# Altium PCB ServoShield.PcbDoc
Units mm, origin at the board's own origin, x right, y up, seen from the top; angles counter-clockwise.
Board outline 82.5 x 82.5 mm, 2 copper layers (Top Layer, Bottom Layer); 45 components, 113 nets, 285 pads, 182 vias.
Unrouted connection lines stored in the file: 1.
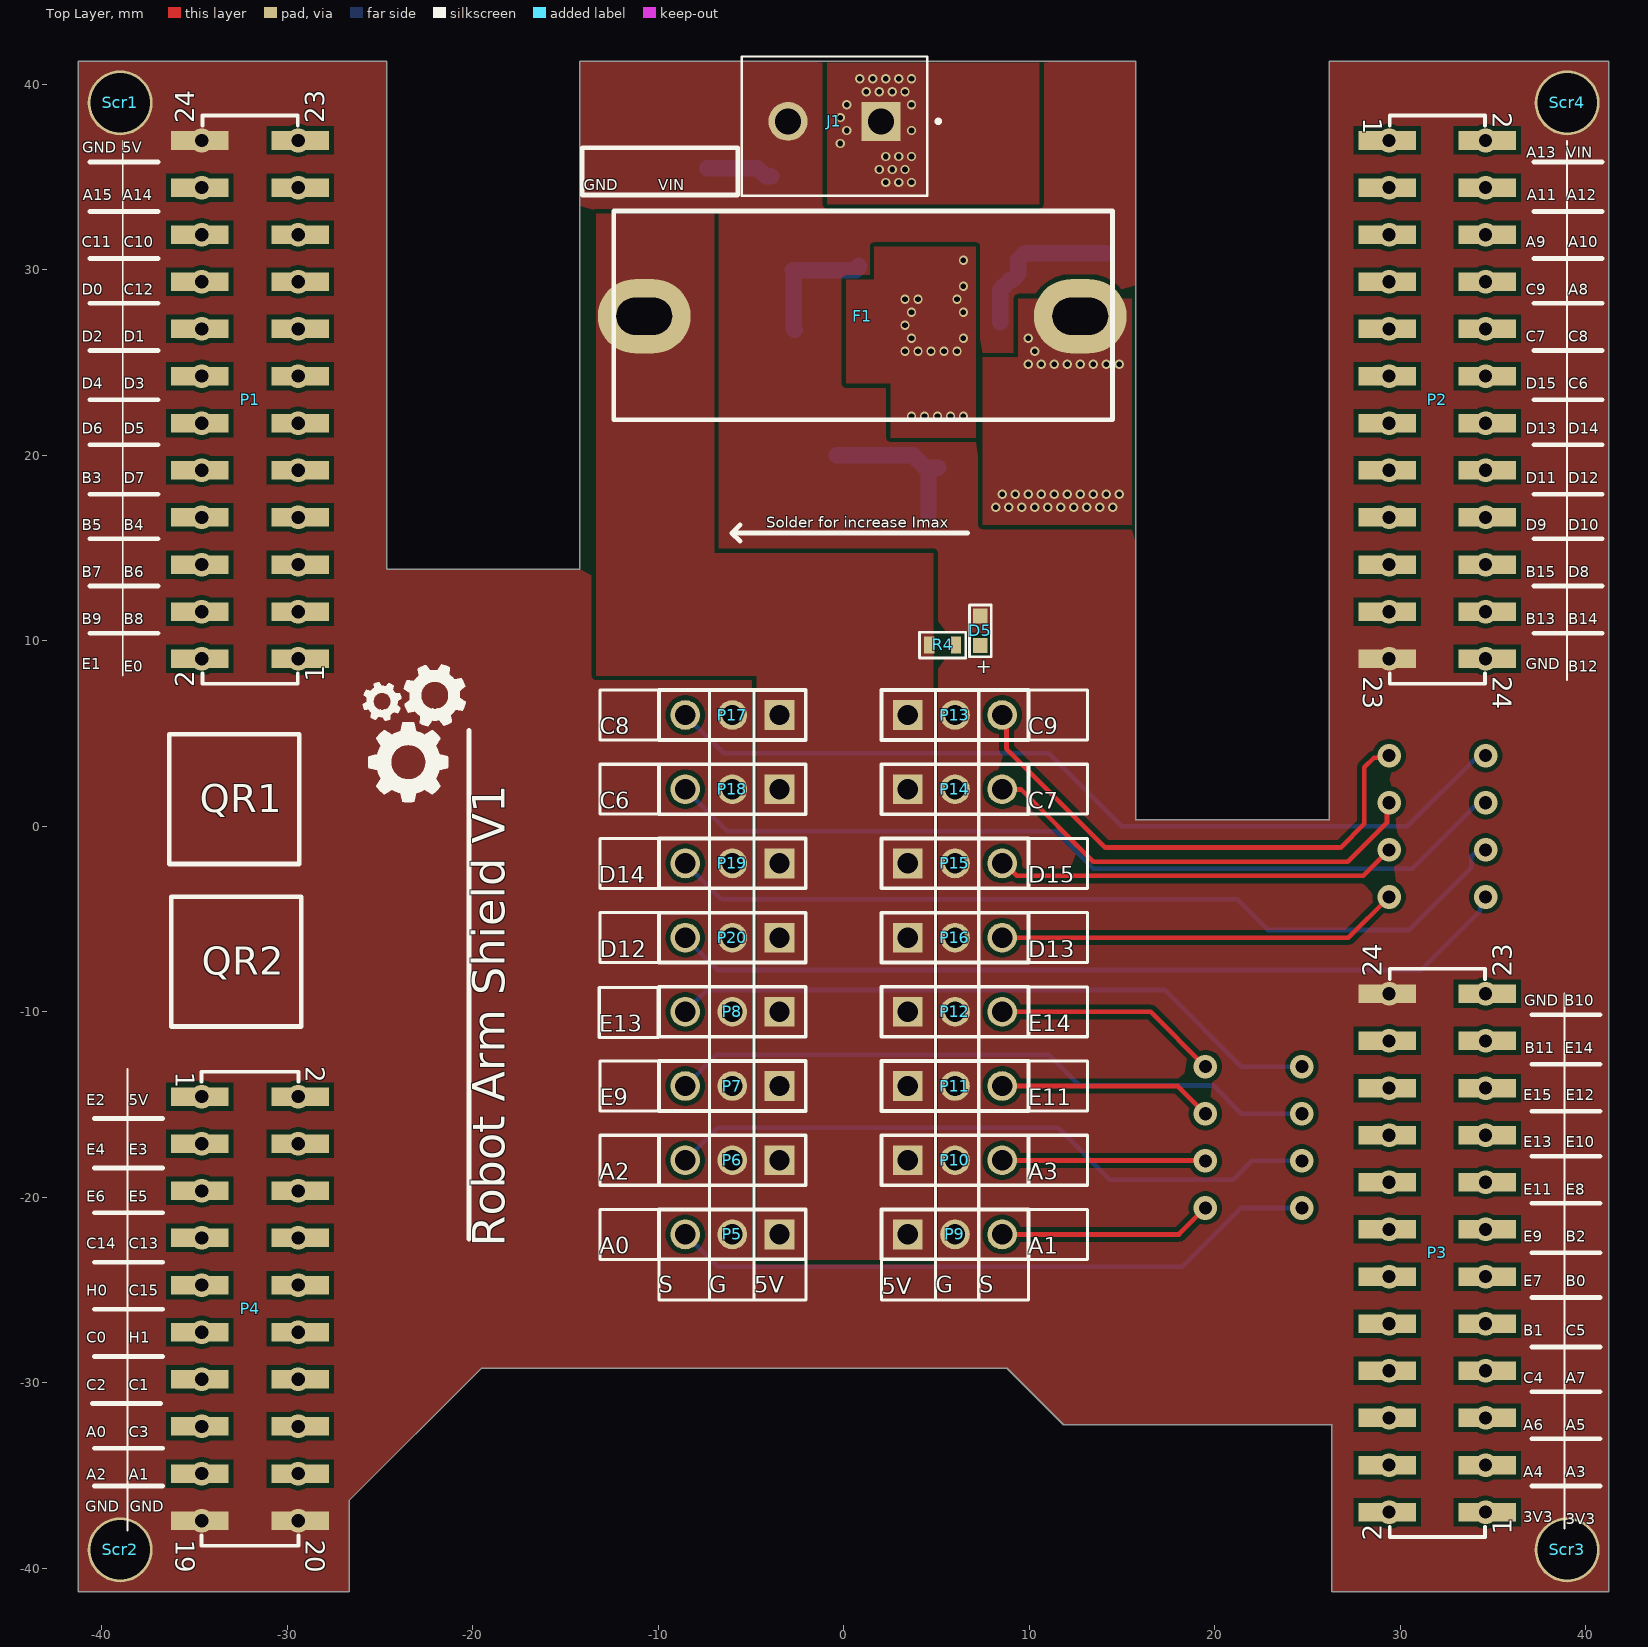
[diagram p0: Top Layer view]
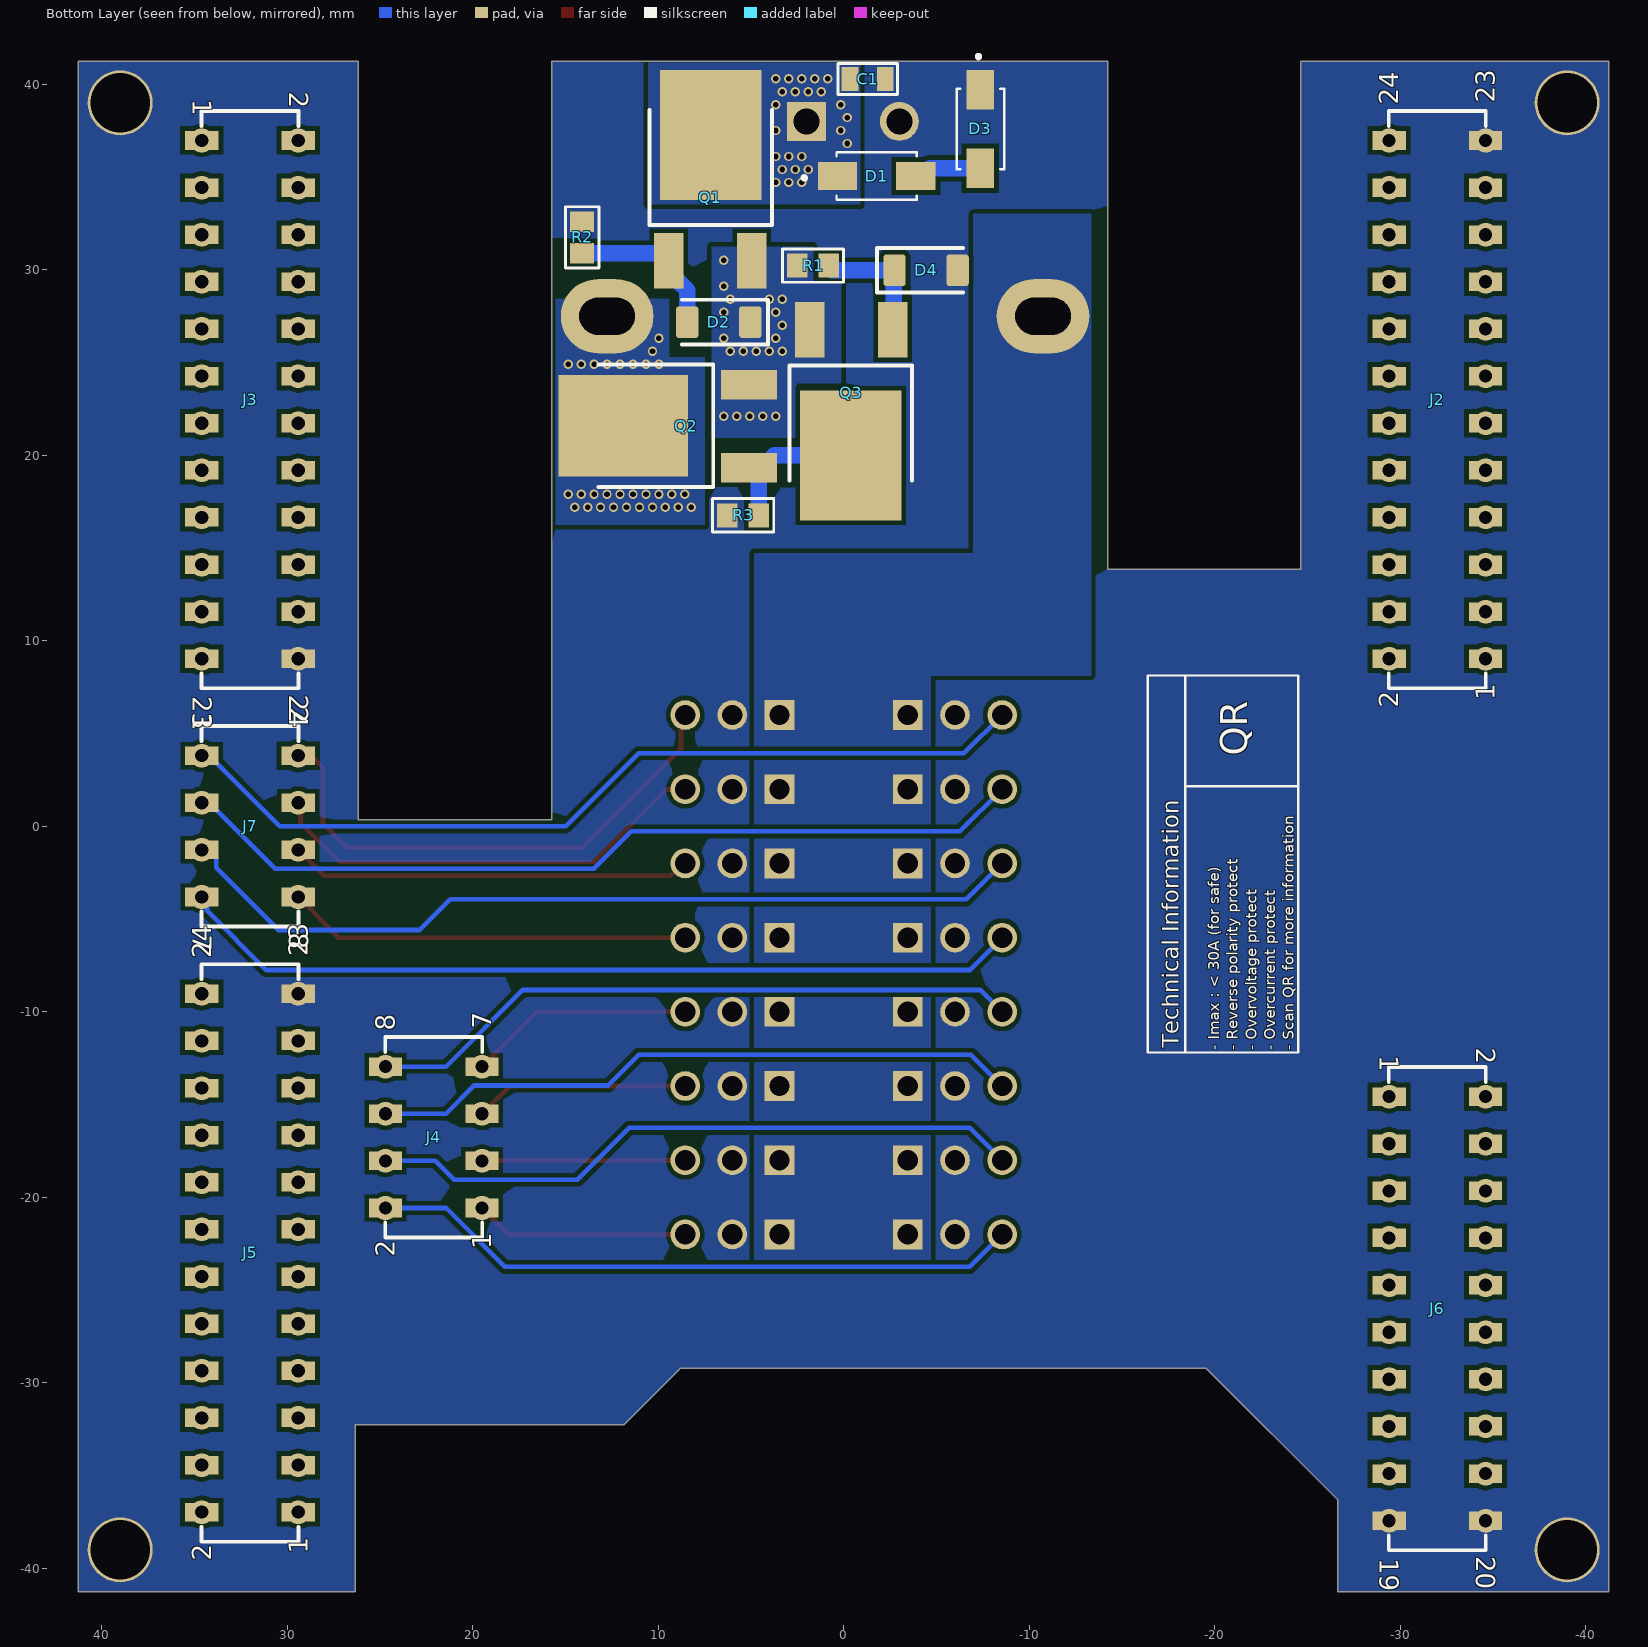
[diagram p1: Bottom Layer view, seen from below]
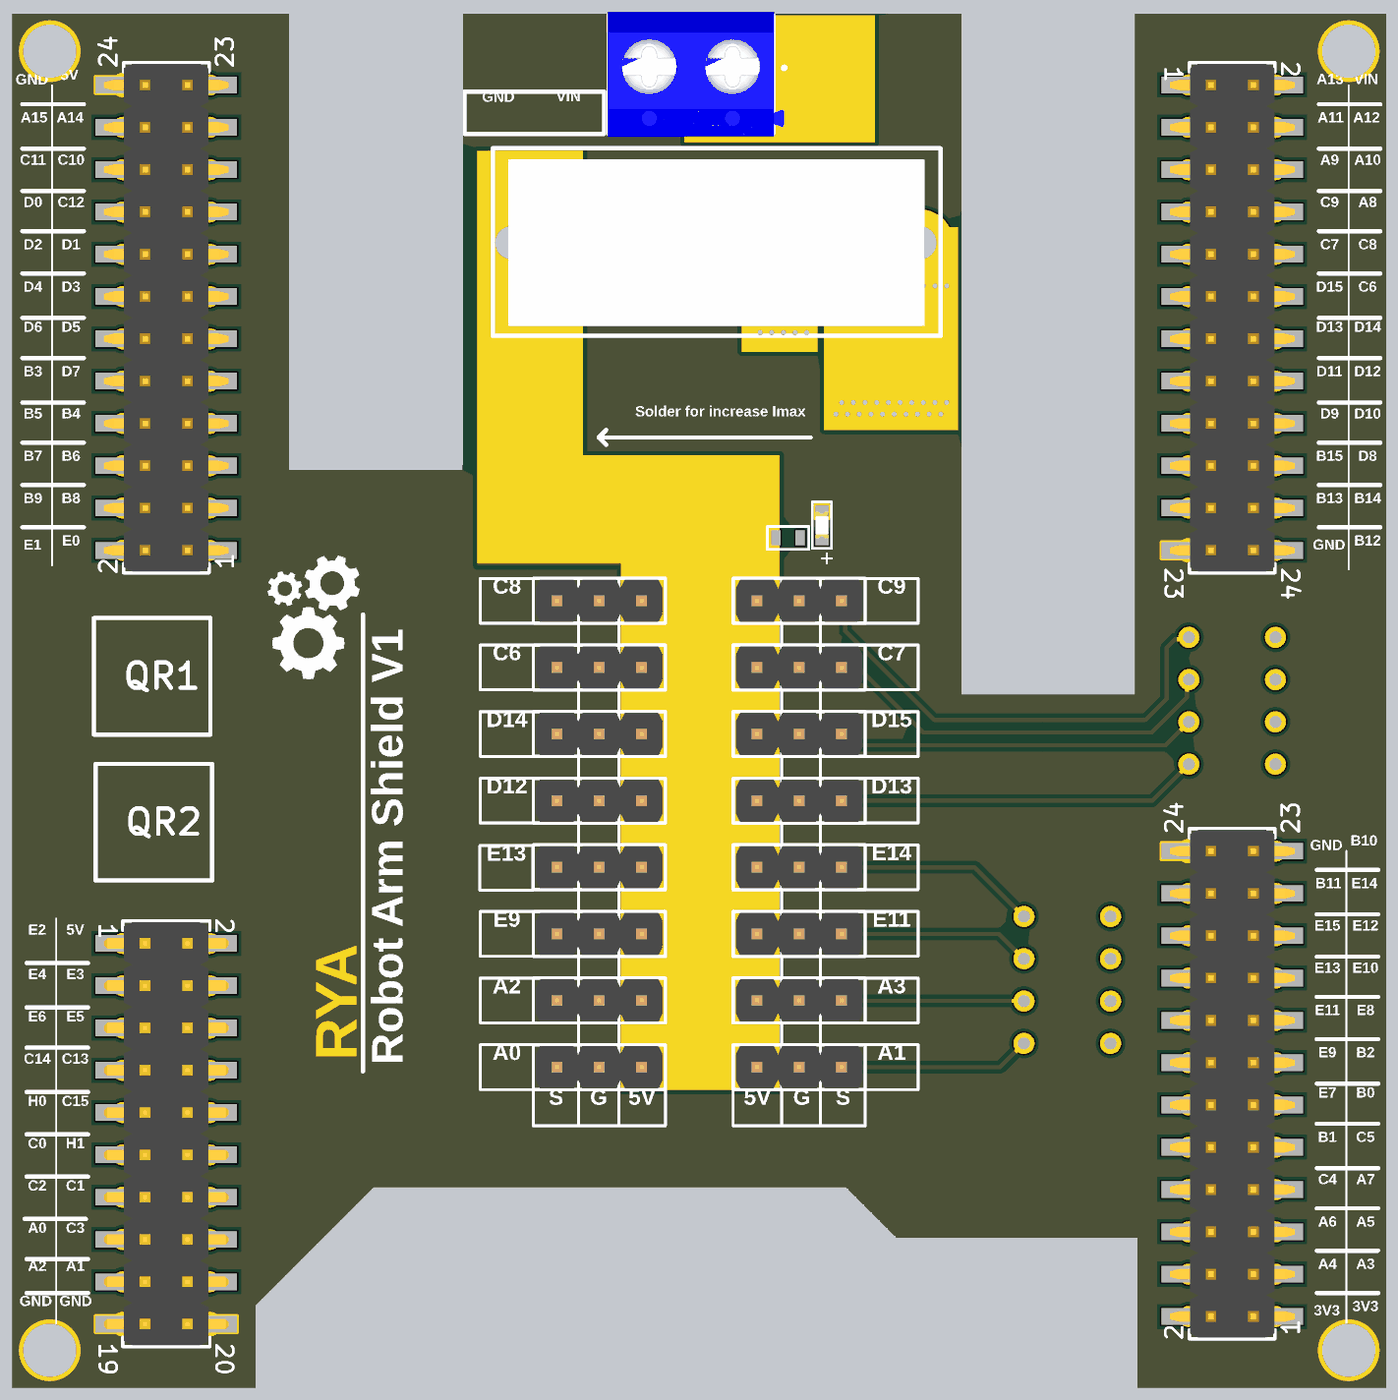
[diagram p2: 3D render of the assembled board from above, using the file's embedded part models]
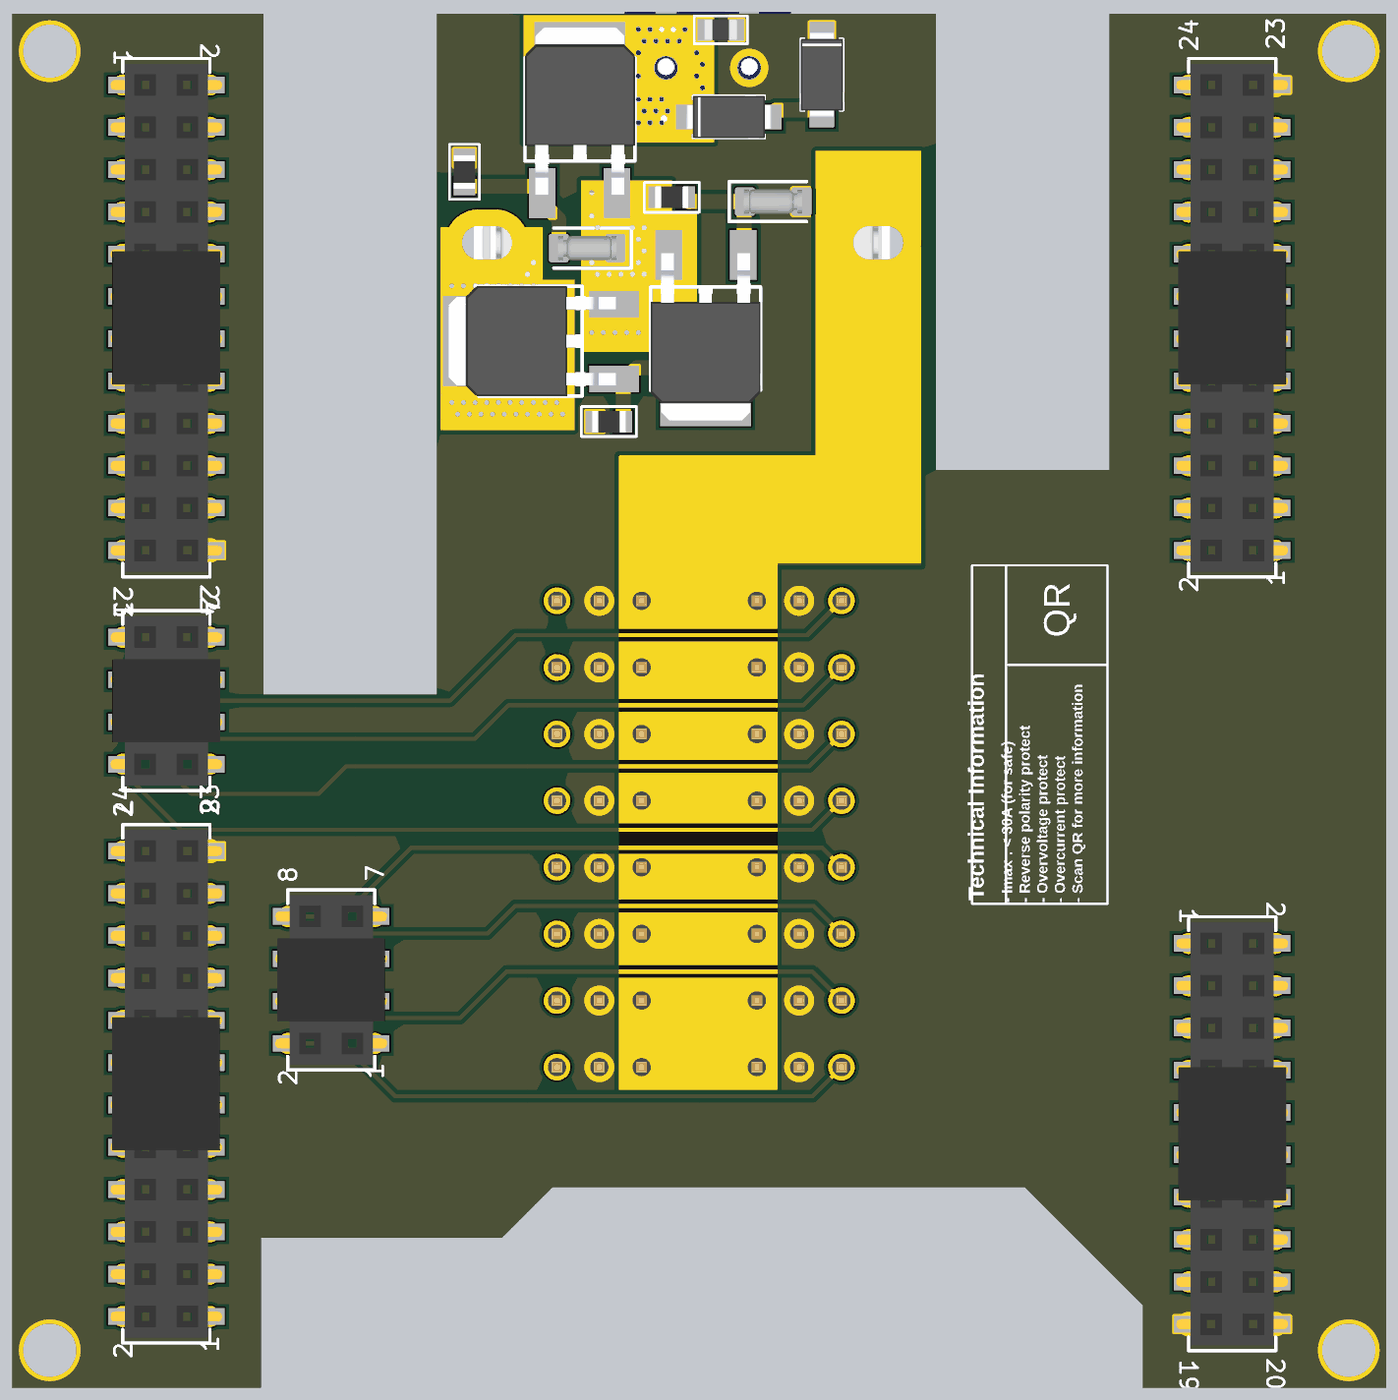
[diagram p3: 3D render of the assembled board from below, using the file's embedded part models]

## Layer stack, top to bottom
Top Solder: solder mask 0.0102, Solder Resist, Dk 3.5
Top Layer: signal copper 0.0356
Dielectric 1: dielectric 0.32, FR-4, Dk 4.8
Bottom Layer: signal copper 0.0356
Bottom Solder: solder mask 0.0102, Solder Resist, Dk 3.5

## Board outline
-26.643,-41.25 -26.643,-36.322 -19.531,-29.21 8.79,-29.21 11.838,-32.258 26.316,-32.258 26.316,-41.25 41.25,-41.25 41.25,41.25 26.162,41.25 26.162,0.356 15.748,0.356 15.748,41.25 -14.224,41.25 -14.224,13.848 -24.638,13.848 -24.638,41.25 -41.25,41.25 -41.25,-41.25

## Design rules (kind name [scope] priority, off if disabled: settings)
Clearance [All] p1: gap=0.254 ignorepadtopadclearanceinfootprint=FALSE
PolygonConnect [All] p1: connectstyle=Direct reliefconductorwidth=0.254 reliefentries=4 polygonreliefangle="90 Angle" airgapwidth=0.254
RoutingVias [All] p1: holewidth=0.711 width=1.27 viastyle="Through Hole" minholewidth=0.711 minwidth=1.27 maxholewidth=0.711 maxwidth=1.27
SolderMaskExpansion [All] p1: expansion=0.102 istentingtop=FALSE
SupplyNets "Schematic Supply Nets_8" [InNet('HD_3V3-1')] p1: voltage=0.000
SupplyNets "Schematic Supply Nets_7" [InNet('HD_5V-2')] p2: voltage=0.000
SupplyNets "Schematic Supply Nets_6" [InNet('HD_5V-1')] p3: voltage=0.000
SupplyNets "Schematic Supply Nets_4" [InNet('HD_Vin')] p4: voltage=0.000
SupplyNets "Schematic Supply Nets_2" [InNet('HD_3V3')] p5: voltage=0.000
SupplyNets "Schematic Supply Nets" [InNet('VDIn')] p6: voltage=0.000
SupplyNets "Schematic Supply Nets_3" [InNet('5V')] p7: voltage=0.000
SupplyNets "Schematic Supply Nets_1" [InNet('GND')] p8: voltage=0.000
Width "Schematic Width Constraint_13" [InNet('NetD2_K')] p1: maxlimit=2.54 minlimit=1.27 preferedwidth=1.27
Width "Schematic Width Constraint_12" [InNet('NetF1_0')] p2: maxlimit=2.54 minlimit=1.27 preferedwidth=1.27
Width "Schematic Width Constraint_11" [InNet('GND')] p3: maxlimit=12.7 minlimit=0.762 preferedwidth=0.889 minimp=50.000000 maximp=50.000000 favimp=50.000000
Width "Schematic Width Constraint_10" [InNet('NetD1_A')] p4: maxlimit=12.7 minlimit=0.762 preferedwidth=0.889 minimp=50.000000 maximp=50.000000 favimp=50.000000
Width "Schematic Width Constraint_9" [InNet('VDIn')] p5: maxlimit=12.7 minlimit=0.762 preferedwidth=0.889 minimp=50.000000 maximp=50.000000 favimp=50.000000
Width "Schematic Width Constraint_8" [InNet('NetD2_A')] p6: maxlimit=5.08 minlimit=0.762 preferedwidth=0.889 minimp=50.000000 maximp=50.000000 favimp=50.000000
Width "Schematic Width Constraint_7" [InNet('VDIn')] p7: maxlimit=5.08 minlimit=0.762 preferedwidth=0.889 minimp=50.000000 maximp=50.000000 favimp=50.000000
Width "Schematic Width Constraint_6" [InNet('NetD4_K')] p8: maxlimit=5.08 minlimit=0.762 preferedwidth=0.889
Width "Schematic Width Constraint_5" [InNet('NetQ2_1')] p9: maxlimit=5.08 minlimit=0.762 preferedwidth=0.889
Width "Schematic Width Constraint_4" [InNet('GND')] p10: maxlimit=5.08 minlimit=0.762 preferedwidth=0.889 minimp=50.000000 maximp=50.000000 favimp=50.000000
Width "Schematic Width Constraint_3" [InNet('NetF1_0')] p11: maxlimit=5.08 minlimit=0.762 preferedwidth=0.889
Width "Schematic Width Constraint_2" [InNet('NetD2_K')] p12: maxlimit=5.08 minlimit=0.762 preferedwidth=0.889 minimp=50.000000 maximp=50.000000 favimp=50.000000
Width "Schematic Width Constraint_1" [InNet('5V')] p13: maxlimit=5.08 minlimit=0.762 preferedwidth=0.889
Width "Schematic Width Constraint" [InNet('5V')] p14: maxlimit=2.54 minlimit=1.27 preferedwidth=1.27
Width [All] p15: maxlimit=0.254 minlimit=0.254 preferedwidth=0.254
30 further rules are at their usual default settings.

## Classes and differential pairs
component class U_Protect: C1 D1 D2 D3 D4 F1 Q1 Q2 Q3 R1 R2 R3
component class U_ServoConnect: P5 P6 P7 P8 P9 P10 P11 P12 P13 P14 P15 P16 P17 P18 P19 P20
component class U_MBoardConnect: J2 J3 J4 J5 J6 J7 P1 P2 P3 P4
component class TopLevelDesign: D5 J1 R4 Scr1 Scr2 Scr3 Scr4

## Components (designator, comment, footprint, x,y, rotation, side; value= is the part's Value field where it differs from the comment)
C1 "0108051041050" CAP_0805 -1.27,40.259 r0 bottom value=100nF
D1 "SMAJ18A" DIOM4325X250N -1.778,35.052 r180 bottom
D2 "ZMM5V1" SOD-80_MiniMELF_Glass 6.731,27.178 r0 bottom value=Shottky-Diode
D3 "SMAJ18A" DIOM4325X250N -7.366,37.592 r270 bottom
D4 "ZMM5V1" SOD-80_MiniMELF_Glass -4.445,29.972 r180 bottom value=Shottky-Diode
D5 "160603RedBlur" WL-SMCW_0603_H=0.7mm 7.366,10.541 r270 top value="Red, 2V"
F1 "0605203000250" Fuse_Clip_0520 1,27.5 r180 top value="250 VAC, 10A"
J1 "KF301-2P" HANDSON_KF301-2P -0.5,38 r180 top
J2 "61032421821" 61032421821 -32,23 r90 bottom
J3 "61032421821" 61032421821 32,23 r270 bottom
J4 "61030821821" 61030821821 22.098,-16.764 r90 bottom
J5 "61032421821" 61032421821 32,-23 r90 bottom
J6 "61032021821" 61032021821 -32,-26 r270 bottom
J7 "61030821821" 61030821821 32,0 r270 bottom
P1 "61002421121" 61002421121 -32,23 r90 top
P2 "61002421121" 61002421121 32,23 r270 top
P3 "61002421121" 61002421121 32,-23 r90 top
P4 "61032021121" 61032021121 -32,-26 r270 top
P5 "61300311121" 61300311121 -6,-22 r180 top
P6 "61300311121" 61300311121 -6,-18 r180 top
P7 "61300311121" 61300311121 -6,-14 r180 top
P8 "61300311121" 61300311121 -6,-10 r180 top
P9 "61300311121" 61300311121 6,-22 r0 top
P10 "61300311121" 61300311121 6,-18 r0 top
P11 "61300311121" 61300311121 6,-14 r0 top
P12 "61300311121" 61300311121 6,-10 r0 top
P13 "61300311121" 61300311121 6,6 r0 top
P14 "61300311121" 61300311121 6,2 r0 top
P15 "61300311121" 61300311121 6,-2 r0 top
P16 "61300311121" 61300311121 6,-6 r0 top
P17 "61300311121" 61300311121 -6,6 r180 top
P18 "61300311121" 61300311121 -6,2 r180 top
P19 "61300311121" 61300311121 -6,-2 r180 top
P20 "61300311121" 61300311121 -6,-6 r180 top
Q1 "AOD4185" DPAK 7.163,35.408 r180 bottom
Q2 "AOD4185" DPAK 10.033,21.59 r90 bottom
Q3 "AOD4185" DPAK -0.381,21.844 r0 bottom
R1 "0008051031" RESISTOR_0805 1.651,30.226 r0 bottom value="10 KOhm, 1/8 W"
R2 "0008051031" RESISTOR_0805 14.097,31.75 r270 bottom value="10 KOhm, 1/8 W"
R3 "0008051031" RESISTOR_0805 5.422,16.764 r180 bottom value="10 KOhm, 1/8 W"
R4 "0006031021" resistor_0603 5.334,9.779 r180 top value="1 KOhm, 1/4 W"
Scr1 "MP3.2" MP3.2 -39,39 r0 top
Scr2 "MP3.2" MP3.2 -39,-39 r0 top
Scr3 "MP3.2" MP3.2 39,-39 r0 top
Scr4 "MP3.2" MP3.2 39,39 r0 top

## Footprints (in the part's own frame and the unit in brackets; to place one, negate y for a bottom-side part, rotate by r counter-clockwise, add the part's x,y. Pads: shape width x height; smd on the part's side, far side on the other; paste and mask are expansions set on the pad)
61002421121 [mm] "Pin Header, pitch 2.54 mm, SMD, Vertical, dual row, 24p"
  rect 1x3.1 smd: 1(-13.97,-2.7) 2(-13.97,2.7) 3(-11.43,-2.7) 4(-11.43,2.7) 5(-8.89,-2.7) 6(-8.89,2.7) 7(-6.35,-2.7) 8(-6.35,2.7) 9(-3.81,-2.7) 10(-3.81,2.7) 11(-1.27,-2.7) 12(-1.27,2.7) 13(1.27,-2.7) 14(1.27,2.7) 15(3.81,-2.7) 16(3.81,2.7) 17(6.35,-2.7) 18(6.35,2.7) 19(8.89,-2.7) 20(8.89,2.7) 21(11.43,-2.7) 22(11.43,2.7) 23(13.97,-2.7) 24(13.97,2.7)
  silkscreen extent -15.32,-2.56 15.32,2.57, body extent -15.24,-3.75 15.24,3.75, height 9.62
61030821821 [mm] "Socket Header, Pitch 2.54 mm, SMT, Vertical, dual row, 8p"
  rect 1x1.8 smd: 1(-3.81,-2.6) 2(-3.81,2.6) 3(-1.27,-2.6) 4(-1.27,2.6) 5(1.27,-2.6) 6(1.27,2.6) 7(3.81,-2.6) 8(3.81,2.6)
  silkscreen extent -5.41,-2.62 5.41,2.62, body extent -5.08,-3.35 5.08,3.35, height 8.52
61032021121 [mm] "Pin Header, pitch 2.54 mm, SMD, Vertical, dual row, 20p"
  rect 1x3.1 smd: 1(-11.43,-2.7) 2(-11.43,2.7) 3(-8.89,-2.7) 4(-8.89,2.7) 5(-6.35,-2.7) 6(-6.35,2.7) 7(-3.81,-2.7) 8(-3.81,2.7) 9(-1.27,-2.7) 10(-1.27,2.7) 11(1.27,-2.7) 12(1.27,2.7) 13(3.81,-2.7) 14(3.81,2.7) 15(6.35,-2.7) 16(6.35,2.7) 17(8.89,-2.7) 18(8.89,2.7) 19(11.43,-2.7) 20(11.43,2.7)
  silkscreen extent -12.78,-2.62 12.78,2.62, body extent -12.7,-3.75 12.7,3.75, height 9.62
61032021821 [mm] "Socket Header, Pitch 2.54 mm, SMT, Vertical, dual row, 20p"
  rect 1x1.8 smd: 1(-11.43,-2.6) 2(-11.43,2.6) 3(-8.89,-2.6) 4(-8.89,2.6) 5(-6.35,-2.6) 6(-6.35,2.6) 7(-3.81,-2.6) 8(-3.81,2.6) 9(-1.27,-2.6) 10(-1.27,2.6) 11(1.27,-2.6) 12(1.27,2.6) 13(3.81,-2.6) 14(3.81,2.6) 15(6.35,-2.6) 16(6.35,2.6) 17(8.89,-2.6) 18(8.89,2.6) 19(11.43,-2.6) 20(11.43,2.6)
  silkscreen extent -13.03,-2.62 13.03,2.62, body extent -12.7,-3.35 12.7,3.35, height 8.52
61032421821 [mm] "Socket Header, Pitch 2.54 mm, SMT, Vertical, dual row, 24p"
  rect 1x1.8 smd: 1(-13.97,-2.6) 2(-13.97,2.6) 3(-11.43,-2.6) 4(-11.43,2.6) 5(-8.89,-2.6) 6(-8.89,2.6) 7(-6.35,-2.6) 8(-6.35,2.6) 9(-3.81,-2.6) 10(-3.81,2.6) 11(-1.27,-2.6) 12(-1.27,2.6) 13(1.27,-2.6) 14(1.27,2.6) 15(3.81,-2.6) 16(3.81,2.6) 17(6.35,-2.6) 18(6.35,2.6) 19(8.89,-2.6) 20(8.89,2.6) 21(11.43,-2.6) 22(11.43,2.6) 23(13.97,-2.6) 24(13.97,2.6)
  silkscreen extent -15.57,-2.62 15.57,2.62, body extent -15.24,-3.35 15.24,3.35, height 8.52
61300311121 [mm] "Pin Header, pitch 2.54 mm, THT, Vertical, single row, 3p"
  rect 1.6x1.6 hole 1.1: 1(-2.54,0)
  round 1.6 hole 1.1: 2(0,0) 3(2.54,0)
  silkscreen extent -3.96,-1.35 3.96,1.35, body extent -3.81,-1.27 3.81,1.27, height 8.57
CAP_0805 [mm]
  rect 0.9x1.3 smd: 1(-0.975,-0.025) 2(0.925,-0.025)
  silkscreen extent -1.63,-0.86 1.57,0.81, body extent -1.03,-0.65 0.97,0.6, height 0.6
DIOM4325X250N [mm]
  rect 2.12x1.5 smd: A(2.115,0) C(-2.115,0)
  silkscreen extent -4,-1.28 2.16,1.28, body extent -2.57,-1.28 2.57,1.28, height 2.5
DPAK [mil]
  rect 63x118 smd: 1(-89,-194) 3(87,-194)
  rect 214.63x275.59 smd: 4(0,72.94)
  silkscreen extent -130,-118 130,126, body extent -130,-198 130,198, height 94
Fuse_Clip_0520 [mm] "Clip Fuse, Size 0520"
  oval 5x4 hole 2 slot 3 at 0 deg: 0(-11.75,0) 1(11.75,0)
  silkscreen extent -13.49,-5.67 13.4,5.59, body extent -12.53,-5 12.47,5, height 15.1
HANDSON_KF301-2P [mm]
  rect 2.1x2.1 hole 1.4: 1(-2.5,0)
  round 2.1 hole 1.4: 2(2.5,0)
  silkscreen extent -5.7,-3.5 5,4, body extent -5.6,-3.37 5,4.13, height 10.13
MP3.2 [mm]
  round 3.5 hole 3.2: 1(0,0)
  body extent -2.75,-2.75 2.74,2.75, height 2.98
resistor_0603 [mm]
  rect 0.55x0.9 smd: 1(-0.725,0) 2(0.725,0)
  silkscreen extent -1.25,-0.69 1.24,0.7, body extent -0.8,-0.45 0.8,0.45, height 0.5
RESISTOR_0805 [mm] "Chip Resistor, 2-Leads, Body 2,00x1,20mm, IPC Medium Density"
  rect 1.1x1.3 smd: 1(-0.85,0) 2(0.85,0)
  silkscreen extent -1.65,-0.9 1.65,0.9, body extent -1,-0.65 1,0.65, height 0.45
SOD-80_MiniMELF_Glass [mm]
  rrect25% 1.2x1.7 smd: A(1.7,0) K(-1.7,0)
  silkscreen extent -2.65,-1.2 2,1.2, body extent -1.76,-0.72 1.74,0.72, height 1.45
WL-SMCW_0603_H=0.7mm [mm] "SMD Mono-color Chip LED, body 1.6x0.8mm"
  rect 0.8x0.8 smd: 1(-0.8,0) 2(0.8,0)
  silkscreen extent -1.4,-0.58 1.4,0.58, body extent -0.8,-0.4 0.8,0.4, height 0.7

## Part data
C1: library part CMP-001-00259-1, "CAP, size 0805, 0.1 nF, 50 VDC", Manufacture Name=TDK, Manufacture SN=CGA4J2X8R1H104K125AD, Operating Temperature="-55 to +125degC", Tolerance=10%, Voltage Rating DC="50 VDC", Component Type=Standard, Design Item ID=0108051041050, Mounting Technology=SMT, Packaging="Tape and Reel", Pins=2, Size=0805, Source=Capacitor_0805_10_percent.SchLib, Supplier 1 Name=Mouser, Supplier 1 SN=810-C2012X8R1H104KEP, Supplier 1 URL=https://www.mouser.vn/ProductDetail/TDK/CGA4J2X8R1H104K125AD?qs=LcTL%2F5vFEzExqZqv3rh1qQ%3D%3D&utm_source=mouser-refine-download&utm_medium=file&utm_campaign=CGA4J2X8R1H104K125AD&utm_content=TDK, Supplier 2 Name=Digi-Key, Supplier 2 SN=445-8810-2-ND, Supplier 2 URL=https://www.digikey.com/en/products/detail/tdk-corporation/cga4j2x8r1h104k125ad/3248169, Supplier 3 Name=thegioiic, Supplier 3 SN=OEM, Supplier 3 URL=N/A
D1 D3: library part CMP-004-00085-1, "400W, 21.1V, 5%, Unidirectional, TVS", Case/Package="SMA-2 Taiwan Semiconductor", Check_prices=https://www.snapeda.com/parts/SMAJ18A/taiwan/view-part/?ref=eda, Component Type=Standard, Design Item ID=SMAJ18A, MF="Taiwan Semiconductor", MP=SMAJ18A, Pins=2, SnapEDA_Link=https://www.snapeda.com/parts/SMAJ18A/taiwan/view-part/?ref=snap, Source=SMAJ18A.SchLib
D2 D4: library part CMP-004-00086-2, Component Type=Standard, Datasheet=https://diotec.com/de/produktliste/SBD.html, Design Item ID=Schottky-Diode, ki_description="Schottky Diode", ki_keywords=Schottky, Pins=2, Reference=D, Source=schottky-diode.SchLib
D5: library part CMP-004-00093-1, "WL-SMCW SMT Mono-color Chip LED Blur, size 0603, Red, 2V, 140deg", Color=Red, Component Type=Standard, ComponentLink1Description="Datasheet link", ComponentLink1URL=N/A, ComponentLink2Description="Supplier 1 URL", ComponentLink2URL=https://www.mouser.vn/ProductDetail/ROHM-Semiconductor/CSL1901VW1?qs=vvQtp7zwQdNmrXZcE27xEA%3D%3D, ComponentLink3Description="Supplier 2 URL", ComponentLink3URL=https://www.digikey.com/en/products/detail/rohm-semiconductor/SML-D12U8WT86/1641799, ComponentLink4Description="Supplier 3 URL", ComponentLink4URL=N/A, Design Item ID=160603RedBlur, Pins=2, Size=0603, Source=WL-SMCW_0603.SchLib, Supplier 1 Name=Mouser, Supplier 1 SN=755-CSL1901VW1, Supplier 1 URL=https://www.mouser.vn/ProductDetail/ROHM-Semiconductor/CSL1901VW1?qs=vvQtp7zwQdNmrXZcE27xEA%3D%3D, Supplier 2 Name=Digi-Key, Supplier 2 SN=511-1580-2-ND, Supplier 2 URL=https://www.digikey.com/en/products/detail/rohm-semiconductor/SML-D12U8WT86/1641799, Supplier 3 Name=ICDayRoi, Supplier 3 SN=N/A, Supplier 3 URL=N/A, Type=Blur
F1: library part CMP-005-00030-1, "Ceramic Fuse, Size 0520, 250 VAC, 30A", Hold Current=10A, Manufacturer=Littelfuse, Threshold Current="1.5kA (250VAC)", Threshold Voltage=250VAC, Component Type=Standard, ComponentLink1Description="Datasheet link", ComponentLink1URL=https://www.littelfuse.com/~/media/electronics/datasheets/fuses/littelfuse_fuse_234_datasheet.pdf.pdf, ComponentLink2Description="Supplier 1 URL", ComponentLink2URL=https://www.mouser.vn/ProductDetail/Littelfuse/0215010.MXP?qs=qI%252BDxnNls1%252BmXG81o%252BQ0mA%3D%3D, ComponentLink3Description="Supplier 2 URL", ComponentLink3URL=https://www.digikey.com/en/products/detail/littelfuse-inc/0215010-MXP/777449, ComponentLink4Description="Supplier 3 URL", ComponentLink4URL=https://www.thegioiic.com/cau-chi-su-10a-5x20mm, Design Item ID=0605201000250, Mounting Technology="Holder / Clip", Pins=2, Size=0520, Source=Fuse_Clip.SchLib, Supplier 1 Name=Mouser, Supplier 1 SN=576-0215010.MXP, Supplier 1 URL=https://www.mouser.vn/ProductDetail/Littelfuse/0215010.MXP?qs=qI%252BDxnNls1%252BmXG81o%252BQ0mA%3D%3D, Supplier 2 Name=Digi-Key, Supplier 2 SN=F1699-ND, Supplier 2 URL=https://www.digikey.com/en/products/detail/littelfuse-inc/0215010-MXP/777449, Supplier 3 Name=thegioiic, Supplier 3 SN=N/A, Supplier 3 URL=https://www.thegioiic.com/cau-chi-su-10a-5x20mm
J1: library part CMP-118-000001-1, "2 Pin Terminal Block 5mm Pitch", Package=None, Availability=Unavailable, Design Item ID=KF301-2P, MP=KF301-2P, Price=None, Source=KF301-2P.SchLib
J2 J3 J5: library part CMP-002-00462-1, "WR-PHD Socket Header, SMT, pitch 2.54mm, Dual Row, Vertical, 24p", Contact Resistance=20mOhm, Manufacturer="Wurth Elektronik", Operating Temperature="-40 to +105degC", Rated Current=3A, Withstanding Voltage=600VAC, Working Voltage=250VAC, Component Type=Standard, ComponentLink1Description=Manufacturer, ComponentLink1URL=http://www.we-online.de, ComponentLink2Description=Datasheet, ComponentLink2URL=https://www.we-online.com/catalog/datasheet/61032421821.pdf, ComponentLink3Description="Global Supply", ComponentLink3URL=https://www.we-online.com/en/components/products/PHD_2_54_SMT_DUAL_SOCKET_HEADER_6100XX21821?sq=61032421821#61032421821, ComponentLink4Description="Global Supply", ComponentLink4URL=https://www.mouser.vn/ProductDetail/Wurth-Elektronik/61032421821?qs=Cb2nCFKsA8olwuXV8WYPMw%3D%3D, Design Item ID=61032421821, Gender="Socket Header", Manufacturer Part Number=61032421821, Mounting Technology=SMT, Orientation=Vertical, Packaging="Tape and Reel", Pin Number=24, Pins=24, Pitch=2.54mm, Published Date="May 2020", Row Number=Dual, Source="WR-PHD_Socket Header_2.54mm.SchLib", Supplier 1 Name=Mouser, Supplier 1 SN=710-61032421821, Supplier 1 URL=https://www.mouser.vn/ProductDetail/Wurth-Elektronik/61032421821?qs=Cb2nCFKsA8olwuXV8WYPMw%3D%3D, Supplier 2 Name=Digi-Key, Supplier 2 SN=N/A, Supplier 2 URL=N/A, Supplier 3 Name=thegioiic, Supplier 3 SN=N/A, Supplier 3 URL=N/A, System=Connector
J4 J7: library part CMP-002-00443-1, "WR-PHD Socket Header, SMT, pitch 2.54mm, Dual Row, Vertical, 8p", Contact Resistance=20mOhm, Manufacturer="Wurth Elektronik", Operating Temperature="-40 to +105degC", Rated Current=3A, Withstanding Voltage=600VAC, Working Voltage=250VAC, Component Type=Standard, ComponentLink1Description=Manufacturer, ComponentLink1URL=http://www.we-online.de, ComponentLink2Description=Datasheet, ComponentLink2URL=https://www.we-online.com/catalog/datasheet/61030821821.pdf, ComponentLink3Description="Global Supply", ComponentLink3URL=https://www.we-online.com/en/components/products/PHD_2_54_SMT_DUAL_SOCKET_HEADER_6100XX21821?sq=61030821821#61030821821, ComponentLink4Description="Global Supply", ComponentLink4URL=https://www.mouser.vn/ProductDetail/Wurth-Elektronik/61030821821?qs=Cb2nCFKsA8oJEHHhLPQ3%2Fg%3D%3D, Design Item ID=61030821821, Gender="Socket Header", Manufacturer Part Number=61030821821, Mounting Technology=SMT, Orientation=Vertical, Packaging="Tape and Reel", Pin Number=8, Pins=8, Pitch=2.54mm, Published Date="May 2020", Row Number=Dual, Source="WR-PHD_Socket Header_2.54mm.SchLib", Supplier 1 Name=Mouser, Supplier 1 SN=710-61030821821, Supplier 1 URL=https://www.mouser.vn/ProductDetail/Wurth-Elektronik/61030821821?qs=Cb2nCFKsA8oJEHHhLPQ3%2Fg%3D%3D, Supplier 2 Name=Digi-Key, Supplier 2 SN=N/A, Supplier 2 URL=N/A, Supplier 3 Name=thegioiic, Supplier 3 SN=N/A, Supplier 3 URL=N/A, System=Connector
J6: library part CMP-002-00459-1, "WR-PHD Socket Header, SMT, pitch 2.54mm, Dual Row, Vertical, 20p", Contact Resistance=20mOhm, Manufacturer="Wurth Elektronik", Operating Temperature="-40 to +105degC", Rated Current=3A, Withstanding Voltage=600VAC, Working Voltage=250VAC, Component Type=Standard, ComponentLink1Description=Manufacturer, ComponentLink1URL=http://www.we-online.de, ComponentLink2Description=Datasheet, ComponentLink2URL=https://www.we-online.com/catalog/datasheet/61032021821.pdf, ComponentLink3Description="Global Supply", ComponentLink3URL=https://www.we-online.com/en/components/products/PHD_2_54_SMT_DUAL_SOCKET_HEADER_6100XX21821?sq=61032021821#61032021821, ComponentLink4Description="Global Supply", ComponentLink4URL=https://www.mouser.vn/ProductDetail/Wurth-Elektronik/61032021821?qs=Cb2nCFKsA8rLJ0ZbRtJw1w%3D%3D, Design Item ID=61032021821, Gender="Socket Header", Manufacturer Part Number=61032021821, Mounting Technology=SMT, Orientation=Vertical, Packaging="Tape and Reel", Pin Number=20, Pins=20, Pitch=2.54mm, Published Date="May 2020", Row Number=Dual, Source="WR-PHD_Socket Header_2.54mm.SchLib", Supplier 1 Name=Mouser, Supplier 1 SN=710-61032021821, Supplier 1 URL=https://www.mouser.vn/ProductDetail/Wurth-Elektronik/61032021821?qs=Cb2nCFKsA8rLJ0ZbRtJw1w%3D%3D, Supplier 2 Name=Digi-Key, Supplier 2 SN=N/A, Supplier 2 URL=N/A, Supplier 3 Name=thegioiic, Supplier 3 SN=N/A, Supplier 3 URL=N/A, System=Connector
P1 P2 P3: library part CMP-002-00395-1, "WR-PHD Pin Header, SMT, pitch 2.54mm, Dual Row, Vertical, 24p", Contact Resistance=20mOhm, Manufacturer="Wurth Elektronik", Operating Temperature="-40 to +125degC", Rated Current=3A, Withstanding Voltage=500VAC, Working Voltage=250VAC, Component Type=Standard, ComponentLink1Description=Manufacturer, ComponentLink1URL=http://www.we-online.de, ComponentLink2Description=Datasheet, ComponentLink2URL=https://www.we-online.com/catalog/datasheet/61002421121.pdf, ComponentLink3Description="Global Supply", ComponentLink3URL=https://www.we-online.com/en/components/products/PHD_2_54_SMT_DUAL_PIN_HEADER_6100XX21121?sq=61002421121#61002421121, ComponentLink4Description="Global Supply", ComponentLink4URL=https://www.mouser.vn/ProductDetail/Wurth-Elektronik/61002421121?qs=PhR8RmCirEaUrVIpVd3oMg%3D%3D, Design Item ID=61002421121, Gender="Pin Header", Manufacturer Part Number=61002421121, Mounting Technology=SMT, Orientation=Vertical, Packaging=Tube, Pin Number=24, Pins=24, Pitch=2.54mm, Published Date="May 2020", Row Number=Dual, Source="WR-PHD_Pin Header_2.54mm.SchLib", Supplier 1 Name=Mouser, Supplier 1 SN=710-61002421121, Supplier 1 URL=https://www.mouser.vn/ProductDetail/Wurth-Elektronik/61002421121?qs=PhR8RmCirEaUrVIpVd3oMg%3D%3D, Supplier 2 Name=Digi-Key, Supplier 2 SN=N/A, Supplier 2 URL=N/A, Supplier 3 Name=thegioiic, Supplier 3 SN=N/A, Supplier 3 URL=N/A, Supply name 1=Mouser, System=Connector
P4: library part CMP-002-00458-1, "WR-PHD Pin Header, SMT, pitch 2.54mm, Dual Row, Vertical, 20p", Contact Resistance=20mOhm, Manufacturer="Wurth Elektronik", Operating Temperature="-40 to +125degC", Rated Current=3A, Withstanding Voltage=500VAC, Working Voltage=250VAC, Component Type=Standard, ComponentLink1Description=Manufacturer, ComponentLink1URL=http://www.we-online.de, ComponentLink2Description=Datasheet, ComponentLink2URL=https://www.we-online.com/catalog/datasheet/61032021121.pdf, ComponentLink3Description="Global Supply", ComponentLink3URL=https://www.we-online.com/en/components/products/PHD_2_54_SMT_DUAL_PIN_HEADER_6100XX21121?sq=61032021121#61032021121, ComponentLink4Description="Global Supply", ComponentLink4URL=https://www.mouser.vn/ProductDetail/Wurth-Elektronik/61032021121?qs=PhR8RmCirEazLxlZVVgCjg%3D%3D, Design Item ID=61032021121, Gender="Pin Header", Manufacturer Part Number=61032021121, Mounting Technology=SMT, Orientation=Vertical, Packaging="Tape and Reel", Pin Number=20, Pins=20, Pitch=2.54mm, Published Date="May 2020", Row Number=Dual, Source="WR-PHD_Pin Header_2.54mm.SchLib", Supplier 1 Name=Mouser, Supplier 1 SN=710-61032021121, Supplier 1 URL=https://www.mouser.vn/ProductDetail/Wurth-Elektronik/61032021121?qs=PhR8RmCirEazLxlZVVgCjg%3D%3D, Supplier 2 Name=Digi-Key, Supplier 2 SN=N/A, Supplier 2 URL=N/A, Supplier 3 Name=thegioiic, Supplier 3 SN=N/A, Supplier 3 URL=N/A, Supply name 1=Mouser, System=Connector
P5 P6 P7 P8 P9 P10 P11 P12 P13 P14 P15 P16 P17 P18 P19 P20: library part CMP-002-00470-1, "WR-PHD Pin Header, THT, pitch 2.54mm, Single Row, Vertical, 3p", Contact Resistance=20mOhm, Manufacturer="Wurth Elektronik", Operating Temperature="-40 to +105degC", Rated Current=3A, Withstanding Voltage=500VAC, Working Voltage=250VAC, Component Type=Standard, ComponentLink1Description=Manufacturer, ComponentLink1URL=http://www.we-online.de, ComponentLink2Description=Datasheet, ComponentLink2URL=https://www.we-online.com/catalog/datasheet/61300311121.pdf, ComponentLink3Description="Global Supply", ComponentLink3URL=https://www.mouser.vn/ProductDetail/Wurth-Elektronik/61300311121?qs=PhR8RmCirEYxRWFJzNKsUw%3D%3D, Design Item ID=61300311121, Gender="Pin Header", Manufacturer Part Number=61300311121, Mounting Technology=THT, Orientation=Vertical, Packaging=Bag, Pin Number=3, Pins=3, Pitch=2.54mm, Published Date="May 2020", Row Number=Single, Source="WR-PHD_Pin Header_2.54mm.SchLib", Supplier 1 Name=Mouser, Supplier 1 SN=710-61300311121, Supplier 1 URL=https://www.mouser.vn/ProductDetail/Wurth-Elektronik/61300311121?qs=PhR8RmCirEYxRWFJzNKsUw%3D%3D, Supplier 2 Name=Digi-Key, Supplier 2 SN=N/A, Supplier 2 URL=N/A, Supplier 3 Name=thegioiic, Supplier 3 SN=N/A, Supplier 3 URL=N/A, Supply name 1=Mouser
Q1 Q2 Q3: library part CMP-123-000001-2, "P-Channel 40V 40A (Tc) 2.5W (Ta), 62.5W (Tc) Surface Mount TO-252, (D-Pak)", Package="TO-252 Alpha &amp; Omega Semiconductor", Check_prices=https://www.snapeda.com/parts/AOD4185/Alpha/view-part/?ref=eda, Component Type=Standard, Design Item ID=AOD4185, MF="Alpha &", MP=AOD4185, Pin Count=3, SnapEDA_Link=https://www.snapeda.com/parts/AOD4185/Alpha/view-part/?ref=snap, Source=AOD4185.SchLib
R1 R2 R3: library part CMP-009-00482-1, "RES, size 0805, 10 KOhm, 1/8 W", Manufacture  Name="Vishay Dale", Manufacture  SN=CRCW080515K0FKEAC, Rated Power="1/8 W", Resistance Tolerance=+/-1%, Component Type=Standard, ComponentLink1Description="Datasheet link", ComponentLink1URL=https://www.vishay.com/docs/28773/crcwce3.pdf, ComponentLink2Description="Supplier 1 URL", ComponentLink2URL=https://www.mouser.vn/ProductDetail/Vishay-Dale/CRCW080515K0FKEA?qs=bMjB6bAaLEM4rXT2DoR3BA%3D%3D, ComponentLink3Description="Supplier 2 URL", ComponentLink3URL=https://www.digikey.com/en/products/detail/vishay-dale/CRCW080515K0FKEAC/7928558, ComponentLink4Description="Supplier 3 URL", ComponentLink4URL=N/A, Design Item ID=0008051531, Mounting Technology=SMT, Pins=2, Size=0805, Source=Resistor_0805.SchLib, Supplier 1 Name=Mouser, Supplier 1 SN=71-CRCW0805-15K-E3, Supplier 1 URL=https://www.mouser.vn/ProductDetail/Vishay-Dale/CRCW080515K0FKEA?qs=bMjB6bAaLEM4rXT2DoR3BA%3D%3D, Supplier 2 Name=Digi-Key, Supplier 2 SN=541-4136-2-ND, Supplier 2 URL=https://www.digikey.com/en/products/detail/vishay-dale/CRCW080515K0FKEAC/7928558, Supplier 3 Name=Thegioiic, Supplier 3 SN=N/A, Supplier 3 URL=N/A
R4: library part CMP-009-00186-1, "RES, size 0603, 1 KOhm, 1/4 W", Manufacture  Name=OEM, Rated Power="1/4 W", Resistance Tolerance=+/-1%, Component Type=Standard, ComponentLink1Description="Datasheet link", ComponentLink1URL=https://www.yageo.com/upload/media/product/productsearch/datasheet/rchip/PYu-SR_20105_RoHS_L_10.pdf, ComponentLink2Description="Supplier 1 URL", ComponentLink2URL=N/A, ComponentLink3Description="Supplier 2 URL", ComponentLink3URL=https://www.digikey.com/en/products/detail/yageo/SR0603FR-7T1KL/9373103, ComponentLink4Description="Supplier 3 URL", ComponentLink4URL=N/A, Design Item ID=0006031021, Manufacture  SN=OEM, Mounting Technology=SMT, Pins=2, Size=0603, Source=Resistor_0603.SchLib, Supplier 1 Name=Mouser, Supplier 1 SN=71-RCS06031K00FKEA, Supplier 1 URL=https://www.mouser.vn/ProductDetail/Vishay-Dale/RCS06031K00FKEA?qs=sGAEpiMZZMvdGkrng054t9clqp6gtJJdzI9PGMrTQi4RTIuHToNahw%3D%3D, Supplier 2 Name=Digi-Key, Supplier 2 SN="YAG5829TR-ND YAG5829CT-ND YAG5829DKR-ND", Supplier 2 URL=https://www.digikey.com/en/products/detail/yageo/SR0603FR-7T1KL/9373103, Supplier 3 Name=thegioiic, Supplier 3 SN=N/A, Supplier 3 URL=N/A
Scr1 Scr2 Scr3 Scr4: library part CMP-143-000000-1, Component Type=Standard, Design Item ID=MP3.2, Pin Count=1, Source=MP_3P2.SchLib

## Via types
v1: diameter 1.27, hole 0.711, Top Layer to Bottom Layer, 108 vias
v2: diameter 0.508, hole 0.3, Top Layer to Bottom Layer, tented both sides, 74 vias

## Nets (pads, with @x,y where several pads share a name; then routed paths per layer and width w, separated by ;. In a path a pad name is that pad's centre, name@x,y a point inside that pad or via, vN(x,y) a via of type N, cw(c..) or ccw(c..) an arc to the next point about the centre after c; other vN are vias at no path point)
5V: F1.1 P5.1 P6.1 P7.1 P8.1 P9.1 P10.1 P11.1 P12.1 P13.1 P14.1 P15.1 P16.1 P17.1 P18.1 P19.1 P20.1 R4.2
GND: C1.1 D3.C D4.A D5.1 J1.2 J2.23 J3.24 J5.23 J6.19 J6.20 P1.24 P2.23 P3.24 P4.19 P4.20 P5.2 P6.2 P7.2 P8.2 P9.2 P10.2 P11.2 P12.2 P13.2 P14.2 P15.2 P16.2 P17.2 P18.2 P19.2 P20.2 R2.1 R3.1 Scr1.1 Scr2.1 Scr3.1 Scr4.1
  other v1: -34.6,-37.43 -29.4,-37.43 29.4,-9.03 29.4,9.03 -34.6,36.97
HD_3V3: J5.2 P3.1
  other v1: 34.6,-36.97
HD_3V3-1: J5.1 P3.2
  other v1: 29.4,-36.97
HD_5V-1: J2.24 P1.23
  other v1: -29.4,36.97
HD_5V-2: J6.1 P4.2
  other v1: -29.4,-14.57
HD_Vin: J3.1 P2.2
  other v1: 34.6,36.97
NetD1_A: D1.A D3.A | length 3.6
  Bottom Layer w0.889: D3.A -4.628,35.477 -4.203,35.052 D1.A
NetD2_A: D2.A Q1.1 R2.2 | length 8.7
  Bottom Layer w0.889: D2.A 8.431,28.905 8.952,29.426 9.068,29.426 9.423,29.781 9.423,30.544 9.779,30.9 R2.2
NetD2_K: D2.K Q1.3 Q2.3 Q3.3 R1.2
  other v2: 3.657,22.107 4.357,22.107 5.057,22.107 5.757,22.107 6.457,22.107 3.307,25.607 4.007,25.607 4.707,25.607 5.407,25.607 6.107,25.607 3.657,26.307 6.457,26.307 3.307,27.007 3.657,27.707 6.457,27.707 3.307,28.407 4.007,28.407 6.107,28.407 6.457,29.107 6.457,30.507
NetD4_K: D4.K Q3.1 R1.1 | length 7
  Bottom Layer w0.889: Q3.1 -2.693,26.823 -2.693,29.92 D4.K 0.647,29.972 0.801,30.126 R1.1
NetD5_2: D5.2 R4.1
NetF1_0: F1.0 Q2.4
  other v2: 8.207,17.207 8.907,17.207 9.607,17.207 10.307,17.207 11.007,17.207 11.707,17.207 12.407,17.207 13.107,17.207 13.807,17.207 14.507,17.207 8.557,17.907 9.257,17.907 9.957,17.907 10.657,17.907 11.357,17.907 12.057,17.907 12.757,17.907 13.457,17.907 14.157,17.907 14.857,17.907 9.957,24.907 10.657,24.907 11.357,24.907 12.057,24.907 12.757,24.907 13.457,24.907 14.157,24.907 14.857,24.907 10.307,25.607 9.957,26.307
NetQ2_1: Q2.1 Q3.4 R3.2 | length 8.7
  Bottom Layer w0.889: Q3.4 3.745,19.991 4.407,19.329 Q2.1 4.928,19.329 4.572,18.974 R3.2
PA0: J4.2 P5.3 | length 35.3
  Bottom Layer w0.254: P5.3 -6.791,-23.749 18.262,-23.749 21.437,-20.574 v1(24.698,-20.574)
PA0-p: J6.16 P4.15
  other v1: -34.6,-32.35
PA1: J4.1 P9.3 | length 11.5
  Top Layer w0.254: P9.3 18.072,-22 v1(19.498,-20.574)
PA1-p: J6.17 P4.18
  other v1: -29.4,-34.89
PA2: J4.4 P6.3 | length 35.5
  Bottom Layer w0.254: P6.3 -6.796,-16.256 11.557,-16.256 14.351,-19.05 20.993,-19.05 22.009,-18.034 v1(24.698,-18.034)
PA2-p: J6.18 P4.17
  other v1: -34.6,-34.89
PA3: J4.3 P10.3 | length 11
  Top Layer w0.254: P10.3 8.557,-18.017 19.481,-18.017 v1(19.498,-18.034)
PA3-p: J5.4 P3.3
  other v1: 34.6,-34.43
PA4: J5.3 P3.4
  other v1: 29.4,-34.43
PA5: J5.6 P3.5
  other v1: 34.6,-31.89
PA6: J5.5 P3.6
  other v1: 29.4,-31.89
PA7: J5.8 P3.7
  other v1: 34.6,-29.35
PA8: J3.7 P2.8
  other v1: 34.6,29.35
PA9: J3.6 P2.5
  other v1: 29.4,31.89
PA10: J3.5 P2.6
  other v1: 34.6,31.89
PA11: J3.4 P2.3
  other v1: 29.4,34.43
PA12: J3.3 P2.4
  other v1: 34.6,34.43
PA13: J3.2 P2.1
  other v1: 29.4,36.97
PA14: J2.22 P1.21
  other v1: -29.4,34.43
PA15: J2.21 P1.22
  other v1: -34.6,34.43
PB0: J5.12 P3.11
  other v1: 34.6,-24.27
PB1: J5.9 P3.10
  other v1: 29.4,-26.81
PB2: J5.14 P3.13
  other v1: 34.6,-21.73
PB3: J2.9 P1.10
  other v1: -34.6,19.19
PB4: J2.8 P1.7
  other v1: -29.4,16.65
PB5: J2.7 P1.8
  other v1: -34.6,16.65
PB6: J2.6 P1.5
  other v1: -29.4,14.11
PB7: J2.5 P1.6
  other v1: -34.6,14.11
PB8: J2.4 P1.3
  other v1: -29.4,11.57
PB9: J2.3 P1.4
  other v1: -34.6,11.57
PB10: J5.24 P3.23
  other v1: 34.6,-9.03
PB11: J5.21 P3.22
  other v1: 29.4,-11.57
PB12: J3.23 P2.24
  other v1: 34.6,9.03
PB13: J3.22 P2.21
  other v1: 29.4,11.57
PB14: J3.21 P2.22
  other v1: 34.6,11.57
PB15: J3.20 P2.19
  other v1: 29.4,14.11
PC0: J6.12 P4.11
  other v1: -34.6,-27.27
PC1: J6.13 P4.14
  other v1: -29.4,-29.81
PC2: J6.14 P4.13
  other v1: -34.6,-29.81
PC3: J6.15 P4.16
  other v1: -29.4,-32.35
PC4: J5.7 P3.8
  other v1: 29.4,-29.35
PC5: J5.10 P3.9
  other v1: 34.6,-26.81
PC6: J7.3 P18.3 | length 46.4
  Bottom Layer w0.254: P18.3 -6.268,-0.272 11.448,-0.272 13.462,-2.286 30.644,-2.286 34.2,1.27 v1(34.6,1.27)
PC6-p: J3.11 P2.12
  other v1: 34.6,24.27
PC7: J7.4 P14.3 | length 24.4
  Top Layer w0.254: P14.3 8.555,1.985 9.572,1.985 13.462,-1.905 27.178,-1.905 29.285,0.202 29.285,1.155 v1(29.4,1.27)
PC7-p: J3.10 P2.9
  other v1: 29.4,26.81
PC8: J7.1 P17.3 | length 47.2
  Bottom Layer w0.254: P17.3 -6.477,3.937 11.049,3.937 14.986,0 30.39,0 34.2,3.81 v1(34.6,3.81)
PC8-p: J3.9 P2.10
  other v1: 34.6,26.81
PC9: J7.2 P13.3 | length 28.6
  Top Layer w0.254: P13.3 8.773,5.767 8.773,4.181 14.097,-1.143 26.797,-1.143 28.067,0.127 28.067,3.175 28.587,3.695 29.285,3.695 v1(29.4,3.81)
PC9-p: J3.8 P2.7
  other v1: 29.4,29.35
PC10: J2.20 P1.19
  other v1: -29.4,31.89
PC11: J2.19 P1.20
  other v1: -34.6,31.89
PC12: J2.18 P1.17
  other v1: -29.4,29.35
PC13: J6.7 P4.8
  other v1: -29.4,-22.19
PC14: J6.8 P4.7
  other v1: -34.6,-22.19
PC15: J6.9 P4.10
  other v1: -29.4,-24.73
PD0: J2.17 P1.18
  other v1: -34.6,29.35
PD1: J2.16 P1.15
  other v1: -29.4,26.81
PD2: J2.15 P1.16
  other v1: -34.6,26.81
PD3: J2.14 P1.13
  other v1: -29.4,24.27
PD4: J2.13 P1.14
  other v1: -34.6,24.27
PD5: J2.12 P1.11
  other v1: -29.4,21.73
PD6: J2.11 P1.12
  other v1: -34.6,21.73
PD7: J2.10 P1.9
  other v1: -29.4,19.19
PD8: J3.19 P2.20
  other v1: 34.6,14.11
PD9: J3.18 P2.17
  other v1: 29.4,16.65
PD10: J3.17 P2.18
  other v1: 34.6,16.65
PD11: J3.16 P2.15
  other v1: 29.4,19.19
PD12: J7.7 P20.3 | length 45.8
  Bottom Layer w0.254: P20.3 -6.793,-7.747 31.115,-7.747 34.32,-4.542 34.32,-4.09 v1(34.6,-3.81)
PD12-p: J3.15 P2.16
  other v1: 34.6,19.19
PD13: J7.8 P16.3 | length 21.8
  Top Layer w0.254: P16.3 27.21,-6 v1(29.4,-3.81)
PD13-p: J3.14 P2.13
  other v1: 29.4,21.73
PD14: J7.5 P19.3 | length 46.8
  Bottom Layer w0.254: P19.3 -6.603,-3.937 21.209,-3.937 22.86,-5.588 30.48,-5.588 33.827,-2.241 33.827,-1.643 34.2,-1.27 v1(34.6,-1.27)
PD14-p: J3.13 P2.14
  other v1: 34.6,21.73
PD15: J7.6 P15.3 | length 21.7
  Top Layer w0.254: P15.3 8.666,-2 9.333,-2.667 28.003,-2.667 v1(29.4,-1.27)
PD15-p: J3.12 P2.11
  other v1: 29.4,24.27
PE0: J2.2 P1.1
  other v1: -29.4,9.03
PE1: J2.1 P1.2
  other v1: -34.6,9.03
PE2: J6.2 P4.1
  other v1: -34.6,-14.57
PE3: J6.3 P4.4
  other v1: -29.4,-17.11
PE4: J6.4 P4.3
  other v1: -34.6,-17.11
PE5: J6.5 P4.6
  other v1: -29.4,-19.65
PE6: J6.6 P4.5
  other v1: -34.6,-19.65
PE7: J5.11 P3.12
  other v1: 29.4,-24.27
PE8: J5.16 P3.15
  other v1: 34.6,-19.19
PE9: J4.6 P7.3 | length 35.2
  Bottom Layer w0.254: P7.3 -6.859,-12.319 11.049,-12.319 12.7,-13.97 19.913,-13.97 21.437,-15.494 v1(24.698,-15.494)
PE9-p: J5.13 P3.14
  other v1: 29.4,-21.73
PE10: J5.18 P3.17
  other v1: 34.6,-16.65
PE11: J4.5 P11.3 | length 11.6
  Top Layer w0.254: P11.3 18.004,-14 v1(19.498,-15.494)
PE11-p: J5.15 P3.16
  other v1: 29.4,-19.19
PE12: J5.20 P3.19
  other v1: 34.6,-14.11
PE13: J4.8 P8.3 | length 35.4
  Bottom Layer w0.254: P8.3 -7.359,-8.819 17.302,-8.819 21.437,-12.954 v1(24.698,-12.954)
PE13-p: J5.17 P3.18
  other v1: 29.4,-16.65
PE14: J4.7 P12.3 | length 12.2
  Top Layer w0.254: P12.3 16.544,-10 v1(19.498,-12.954)
PE14-p: J5.22 P3.21
  other v1: 34.6,-11.57
PE15: J5.19 P3.20
  other v1: 29.4,-14.11
PH0: J6.10 P4.9
  other v1: -34.6,-24.73
PH1: J6.11 P4.12
  other v1: -29.4,-27.27
VDIn: C1.2 D1.C J1.1 Q1.4
  other v2: 2.257,34.707 2.957,34.707 3.657,34.707 1.907,35.407 2.607,35.407 3.307,35.407 2.257,36.107 2.957,36.107 3.657,36.107 -0.193,36.807 0.157,37.507 3.657,37.507 -0.193,38.207 0.157,38.907 3.657,38.907 1.207,39.607 1.907,39.607 2.607,39.607 3.307,39.607 0.857,40.307 1.557,40.307 2.257,40.307 2.957,40.307 3.657,40.307

## Polygon pours and split planes (outlines as drawn)
GND on Top Layer "GND_L01_P029" (solid, remove dead copper, pour order 29): -26.643,-41.25 -26.643,-36.322 -19.531,-29.21 8.79,-29.21 11.838,-32.258 26.316,-32.258 26.316,-41.25 41.25,-41.25 41.25,41.25 26.162,41.25 26.162,0.356 15.748,0.356 15.748,41.25 -14.224,41.25 -14.224,13.848 -24.638,13.848 -24.638,41.25 -41.25,41.25 -41.25,-41.25
NetF1_0 on Top Layer "NETF1_0_L01_P024" (solid, pour order 24): 9.398,28.448 15.748,28.448 15.748,16.256 7.493,16.256 7.493,25.273 9.398,25.273
VDIn on Top Layer "VDIN_L01_P022" (solid, pour order 22): 10.541,33.528 3.048,33.528 -0.889,33.528 -0.889,36.576 -0.889,41.148 10.541,41.148
NetD2_K on Top Layer "NETD2_K_L01_P021" (solid, pour order 21): 1.651,29.464 1.651,31.242 3.302,31.242 7.112,31.242 7.112,20.955 2.54,20.955 2.54,23.876 0.127,23.876 0.127,29.464
5V on Top Layer "5V_L01_P019" (solid, pour order 19): -13.335,33.02 -6.985,33.02 -6.985,14.732 4.826,14.732 4.826,-23.368 -4.699,-23.368 -4.699,8.128 -13.335,8.128
GND on Bottom Layer "GND_L02_P030" (solid, remove dead copper, pour order 30): -26.643,-41.25 -26.643,-36.322 -19.531,-29.21 8.79,-29.21 11.838,-32.258 26.316,-32.258 26.316,-41.25 41.25,-41.25 41.25,41.25 26.162,41.25 26.162,0.356 15.748,0.356 15.748,41.25 -14.224,41.25 -14.224,13.848 -24.638,13.848 -24.638,41.25 -41.25,41.25 -41.25,-41.25
NetD2_K on Bottom Layer "NETD2_K_L02_P017" (solid, pour order 17): 1.651,29.464 1.651,31.242 3.302,31.242 7.112,31.242 7.112,20.955 2.54,20.955 2.54,23.876 0.127,23.876 0.127,29.464
VDIn on Bottom Layer "VDIN_L02_P016" (solid, pour order 16): 10.541,33.528 3.048,33.528 -0.889,33.528 -0.889,36.576 -0.889,41.148 10.541,41.148
5V on Bottom Layer "5V_L02_P010" (solid, pour order 10): -13.335,33.02 -6.985,33.02 -6.985,14.732 4.826,14.732 4.826,-23.368 -4.699,-23.368 -4.699,8.128 -13.335,8.128
NetF1_0 on Bottom Layer "NETF1_0_L02_P014" (solid, pour order 14): 9.398,28.448 15.748,28.448 15.748,16.256 7.493,16.256 7.493,25.273 9.398,25.273
NetF1_0 on Bottom Solder "NETF1_0_L01_P013" (solid, pour order 13): 9.398,28.448 15.748,28.448 15.748,16.256 7.493,16.256 7.493,25.273 9.398,25.273
VDIn on Bottom Solder "VDIN_L01_P012" (solid, pour order 12): 10.541,33.528 3.048,33.528 -0.889,33.528 -0.889,36.576 -0.889,41.148 10.541,41.148
NetD2_K on Bottom Solder "NETD2_K_L01_P015" (solid, pour order 15): 1.651,29.464 1.651,31.242 3.302,31.242 7.112,31.242 7.112,20.955 2.54,20.955 2.54,23.876 0.127,23.876 0.127,29.464
5V on Bottom Solder "5V_L01_P009" (solid, pour order 9): -13.335,33.02 -6.985,33.02 -6.985,14.732 4.826,14.732 4.826,-23.368 -4.699,-23.368 -4.699,8.255 -13.335,8.255
5V on Top Solder "5V_L01_P018" (solid, pour order 18): -13.335,33.02 -6.985,33.02 -6.985,14.732 4.826,14.732 4.826,-23.368 -4.699,-23.368 -4.699,8.255 -13.335,8.255
NetD2_K on Top Solder "NETD2_K_L01_P020" (solid, pour order 20): 1.651,29.464 1.651,31.242 3.302,31.242 7.112,31.242 7.112,20.955 2.54,20.955 2.54,23.876 0.127,23.876 0.127,29.464
VDIn on Top Solder "VDIN_L01_P023" (solid, pour order 23): 10.541,33.528 3.048,33.528 -0.889,33.528 -0.889,36.576 -0.889,41.148 10.541,41.148
NetF1_0 on Top Solder "NETF1_0_L01_P026" (solid, pour order 26): 9.398,28.448 15.748,28.448 15.748,16.256 7.493,16.256 7.493,25.273 9.398,25.273
GND on Top Solder "GND_L01_P007" (solid, remove dead copper, pour order 7): -41.148,41.148 41.148,41.148 41.148,-41.148 -41.148,-41.148

## Silkscreen, mask and mechanical layers (free items; w line width, h text height)
Top Overlay:
  drawing of 143 lines, arcs and shapes, not listed
  text "GND" at -41.05,36.085 h1
  text "5V" at -38.891,36.085 h1
  text "A13" at 36.801,35.831 h1
  text "VIN" at 38.96,35.831 h1
  text "GND" at -14.017,34.068 h1
  text "VIN" at -9.993,34.068 h1
  text "A15" at -41.021,33.528 h1
  text "A14" at -38.862,33.528 h1
  text "A11" at 36.83,33.528 h1
  text "A12" at 38.989,33.528 h1
  text "C11" at -41.084,30.988 h1
  text "C10" at -38.798,30.988 h1
  text "A9" at 36.767,30.988 h1
  text "A10" at 39.052,30.988 h1
  text "D0" at -41.084,28.448 h1
  text "C12" at -38.798,28.448 h1
  text "C9" at 36.767,28.448 h1
  text "A8" at 39.052,28.448 h1
  text "D2" at -41.084,25.908 h1
  text "D1" at -38.798,25.908 h1
  text "C7" at 36.767,25.908 h1
  text "C8" at 39.052,25.908 h1
  text "D4" at -41.084,23.368 h1
  text "D3" at -38.798,23.368 h1
  text "D15" at 36.767,23.368 h1
  text "C6" at 39.052,23.368 h1
  text "D6" at -41.084,20.955 h1
  text "D5" at -38.798,20.955 h1
  text "D13" at 36.767,20.955 h1
  text "D14" at 39.052,20.955 h1
  text "B3" at -41.084,18.288 h1
  text "D7" at -38.798,18.288 h1
  text "D11" at 36.767,18.288 h1
  text "D12" at 39.052,18.288 h1
  text "Solder for increase Imax" at -4.166,15.871 h1
  text "B5" at -41.084,15.748 h1
  text "B4" at -38.798,15.748 h1
  text "D9" at 36.767,15.748 h1
  text "D10" at 39.052,15.748 h1
  text "B7" at -41.084,13.208 h1
  text "B6" at -38.798,13.208 h1
  text "B15" at 36.767,13.208 h1
  text "D8" at 39.052,13.208 h1
  text "B9" at -41.084,10.668 h1
  text "B8" at -38.798,10.668 h1
  text "B13" at 36.767,10.668 h1
  text "B14" at 39.052,10.668 h1
  text "E1" at -41.084,8.255 h1
  text "GND" at 36.767,8.255 h1
  text "E0" at -38.798,8.128 h1
  text "B12" at 39.052,8.128 h1
  text "C8" at -13.143,4.655 h1.52
  text "C9" at 9.96,4.655 h1.52
  text "QR1" at -34.719,0.764 h1.52
  text "C6" at -13.143,0.655 h1.52
  text "C7" at 9.96,0.655 h1.52
  text "D14" at -13.191,-3.345 h1.52
  text "D15" at 9.96,-3.345 h1.52
  text "D12" at -13.143,-7.345 h1.52
  text "D13" at 9.96,-7.345 h1.52
  text "QR2" at -34.609,-7.999 h1.52
  text "GND" at 36.674,-9.889 h1
  text "B10" at 38.833,-9.889 h1
  text "E14" at 9.96,-11.345 h1.52
  text "E13" at -13.176,-11.383 h1.52
  text "B11" at 36.703,-12.446 h1
  text "E14" at 38.862,-12.446 h1
  text "E15" at 36.639,-14.986 h1
  text "E12" at 38.925,-14.986 h1
  text "E2" at -40.831,-15.24 h1
  text "5V" at -38.544,-15.24 h1
  text "E9" at -13.143,-15.345 h1.52
  text "E11" at 9.96,-15.345 h1.52
  text "E13" at 36.639,-17.526 h1
  text "E10" at 38.925,-17.526 h1
  text "E4" at -40.831,-17.907 h1
  text "E3" at -38.544,-17.907 h1
  text "A2" at -13.143,-19.345 h1.52
  text "A3" at 9.96,-19.345 h1.52
  text "E11" at 36.639,-20.066 h1
  text "E8" at 38.925,-20.066 h1
  text "E6" at -40.831,-20.447 h1
  text "E5" at -38.544,-20.447 h1
  text "E9" at 36.639,-22.606 h1
  text "B2" at 38.925,-22.606 h1
  text "Robot Arm Shield V1" at -17.666,-22.674 h3 r90
  text "C14" at -40.831,-22.987 h1
  text "C13" at -38.544,-22.987 h1
  text "A0" at -13.143,-23.345 h1.52
  text "A1" at 9.96,-23.345 h1.52
  text "E7" at 36.639,-25.019 h1
  text "B0" at 38.925,-25.019 h1
  text "S" at 7.307,-25.435 h1.52
  text "S" at -9.96,-25.447 h1.52
  text "G" at -7.239,-25.447 h1.52
  text "5V" at -4.826,-25.447 h1.52
  text "G" at 4.953,-25.447 h1.52
  text "H0" at -40.831,-25.527 h1
  text "C15" at -38.544,-25.527 h1
  text "5V" at 2.04,-25.527 h1.52
  text "B1" at 36.639,-27.686 h1
  text "C5" at 38.925,-27.686 h1
  text "C0" at -40.831,-28.067 h1
  text "H1" at -38.544,-28.067 h1
  text "C4" at 36.639,-30.226 h1
  text "A7" at 38.925,-30.226 h1
  text "C2" at -40.831,-30.607 h1
  text "C1" at -38.544,-30.607 h1
  text "A6" at 36.639,-32.766 h1
  text "A5" at 38.925,-32.766 h1
  text "A0" at -40.831,-33.147 h1
  text "C3" at -38.544,-33.147 h1
  text "A4" at 36.639,-35.306 h1
  text "A3" at 38.925,-35.306 h1
  text "A2" at -40.831,-35.433 h1
  text "A1" at -38.544,-35.433 h1
  text "GND" at -40.884,-37.156 h1
  text "GND" at -38.484,-37.156 h1
  text "3V3" at 36.639,-37.719 h1
  text "3V3" at 38.925,-37.846 h1
Bottom Overlay:
  lines w0.127: -24.511,2.159 -18.542,2.159 ; -18.415,-12.192 -18.415,8.128 ; -24.511,-12.192 -24.511,8.128 -16.383,8.128 -16.383,-12.192 -24.511,-12.192
  text "QR" at -22.227,3.81 h2.5 r270
  text "Technical Information" at -18.355,-11.938 h1.5 r270
  text "- Imax : < 30A (for safe) / - Reverse polarity protect  / - Overvoltage protect / - Overcurrent protect / - Scan QR for more information" at -24.47,-12.065 h1 r270
Top Solder:
  text "RYA" at -20.574,-21.59 h4 r90
Drill Guide:
  the board outline again, w0.254

## Text inside footprints (layer, text, board x,y; h text height)
D5: Top Overlay "+" at 7.112,8.255 h0.76
J2: Bottom Overlay "24" at -29.9,38.9 h1.02 r270; Bottom Overlay "23" at -35.1,39 h1.02 r270; Bottom Overlay "1" at -35.1,6.8 h1.02 r270; Bottom Overlay "2" at -29.9,6.4 h1.02 r270
J3: Bottom Overlay "24" at 29.9,7.1 h1.02 r90; Bottom Overlay "23" at 35.1,7 h1.02 r90; Bottom Overlay "1" at 35.1,39.2 h1.02 r90; Bottom Overlay "2" at 29.9,39.6 h1.02 r90
J4: Bottom Overlay "8" at 24.198,-11.024 h1.02 r270; Bottom Overlay "7" at 18.998,-10.924 h1.02 r270; Bottom Overlay "1" at 18.998,-22.804 h1.02 r270; Bottom Overlay "2" at 24.198,-23.204 h1.02 r270
J5: Bottom Overlay "24" at 34.1,-7.1 h1.02 r270; Bottom Overlay "23" at 28.9,-7 h1.02 r270; Bottom Overlay "1" at 28.9,-39.2 h1.02 r270; Bottom Overlay "2" at 34.1,-39.6 h1.02 r270
J6: Bottom Overlay "20" at -34.1,-39.36 h1.02 r90; Bottom Overlay "19" at -28.9,-39.46 h1.02 r90; Bottom Overlay "1" at -28.9,-12.34 h1.02 r90; Bottom Overlay "2" at -34.1,-11.94 h1.02 r90
J7: Bottom Overlay "8" at 29.9,-5.74 h1.02 r90; Bottom Overlay "7" at 35.1,-5.84 h1.02 r90; Bottom Overlay "1" at 35.1,6.04 h1.02 r90; Bottom Overlay "2" at 29.9,6.44 h1.02 r90
P1: Top Overlay "1" at -28,7.8 h1.02 r90; Top Overlay "2" at -35,7.5 h1.02 r90; Top Overlay "23" at -28,37.9 h1.02 r90; Top Overlay "24" at -35,37.9 h1.02 r90
P2: Top Overlay "1" at 28,38.2 h1.02 r270; Top Overlay "2" at 35,38.5 h1.02 r270; Top Overlay "23" at 28,8.1 h1.02 r270; Top Overlay "24" at 35,8.1 h1.02 r270
P3: Top Overlay "1" at 36,-38.2 h1.02 r90; Top Overlay "2" at 29,-38.5 h1.02 r90; Top Overlay "23" at 36,-8.1 h1.02 r90; Top Overlay "24" at 29,-8.1 h1.02 r90
P4: Top Overlay "20" at -29,-38.46 h1.02 r270; Top Overlay "19" at -36,-38.46 h1.02 r270; Top Overlay "1" at -36,-13.24 h1.02 r270; Top Overlay "2" at -29,-12.94 h1.02 r270
Q1: Mechanical 13 "1" at 9.576,32.88 h0.61; Mechanical 13 "2" at 7.366,32.88 h0.61; Mechanical 13 "3" at 5.182,32.88 h0.61; Mechanical 13 "4" at 7.493,37.249 h0.61
Q2: Mechanical 13 "1" at 7.506,19.177 h0.61 r270; Mechanical 13 "2" at 7.506,21.387 h0.61 r270; Mechanical 13 "3" at 7.506,23.571 h0.61 r270; Mechanical 13 "4" at 11.874,21.26 h0.61 r270
Q3: Mechanical 13 "1" at -2.794,24.371 h0.61 r180; Mechanical 13 "2" at -0.584,24.371 h0.61 r180; Mechanical 13 "3" at 1.6,24.371 h0.61 r180; Mechanical 13 "4" at -0.711,20.002 h0.61 r180